# EAGLE board Exquisite Tumelo (EAGLE 7.6.0)

Size 56.82 x 53.33 mm. Coordinates in mm from the lower left corner, seen from the top.
Outline: 0,0 56.82,0 56.82,53.33 0,53.33 0,0
Copper layers (1*16): Top 0.035mm / dielectric 1.5mm / Bottom 0.035mm
Design rules "default": minimum track width 10mil, minimum drill 24mil, track to track 8mil, track to pad 8mil, pad to pad 8mil, via to via 8mil, smd to smd 8mil, copper to edge 40mil, drill to drill 8mil, minimum pad ring 10mil, minimum via ring 8mil, stop-mask expansion 4mil, vias tented up to drill 0mil, thermal gap 10mil

## Footprints (pad centres in the part's own frame; a part is rotated, then mirrored left to right if it is on the bottom)
DC-POWER = drill 0.889 pad 2.54 octagon: + 0,2.54; - 0,-2.54
RADIAL-D11.36MM = drill 1.27 pad 1.905 square: + -2.54,0 | drill 1.27 pad 1.905: - 2.54,0
1X8P-2.54-2.54-11.6-3.0-BLACK-MALE = drill 0.889 pad 1.651 square: 1 0,8.89 | drill 0.889 pad 1.651: 2 0,6.35; 3 0,3.81; 4 0,1.27; 5 0,-1.27; 6 0,-3.81; 7 0,-6.35; 8 0,-8.89
M251 = drill 0.813 long: 1 -2.54,0; 2 0,0; 3 2.54,0
TO220 = drill 1.118 long: 1 -2.54,-6.35; 2 0,-6.35; 3 2.54,-6.35 | hole 3.302: 0,11.176

## Placement (x,y rotation side)
BAT1  [DC-POWER]  5,111.68 0 top  (outside the outline)
C1  470uF  [RADIAL-D11.36MM]  5,10.08 0 top
C2  1uF  [RADIAL-D11.36MM]  5,98.98 0 top  (outside the outline)
JP1  [1X8P-2.54-2.54-11.6-3.0-BLACK-MALE]  5,35.48 0 top
JP2  [1X8P-2.54-2.54-11.6-3.0-BLACK-MALE]  5,48.18 0 top
Meter1  [DC-POWER]  5,73.58 0 top  (outside the outline)
Meter2  [DC-POWER]  5,86.28 0 top  (outside the outline)
S1  [M251]  5,22.78 0 top
U1  [TO220]  5,60.88 0 top

## Library data of the parts
BAT1 C1 C2 JP1 JP2 Meter1 Meter2 S1 U1 = AUTODESK_CIRCUITS_BREADBOARD

## Nets
N$1: BAT1.- C1.- C2.- JP1.1 JP1.2 JP1.3 JP1.4 JP1.5 JP1.6 JP1.7 JP1.8 Meter1.- Meter2.- U1.2
N$2: C1.+ JP2.8 Meter1.+ S1.2 U1.1
N$3: C2.+ Meter2.+ U1.3
N$4: BAT1.+ S1.1

## Tracks (layer width: path | path; a pad name or v marks a point on that pad's centre or on a via)
N$1  (13 unrouted)
N$2  (4 unrouted)
N$3  (2 unrouted)
N$4  (1 unrouted)